# Altium PCB CL-HC-V2.1 sub.PcbDoc (part 1 of 2)
Units mil, origin at the board's own origin, x right, y up, seen from the top; angles counter-clockwise.
Board outline 12846.15 x 9153.85 mil, 2 copper layers (TopLayer, BottomLayer); 137 components, 528 nets, 526 pads, 1 vias.
Unrouted connection lines stored in the file: 32.
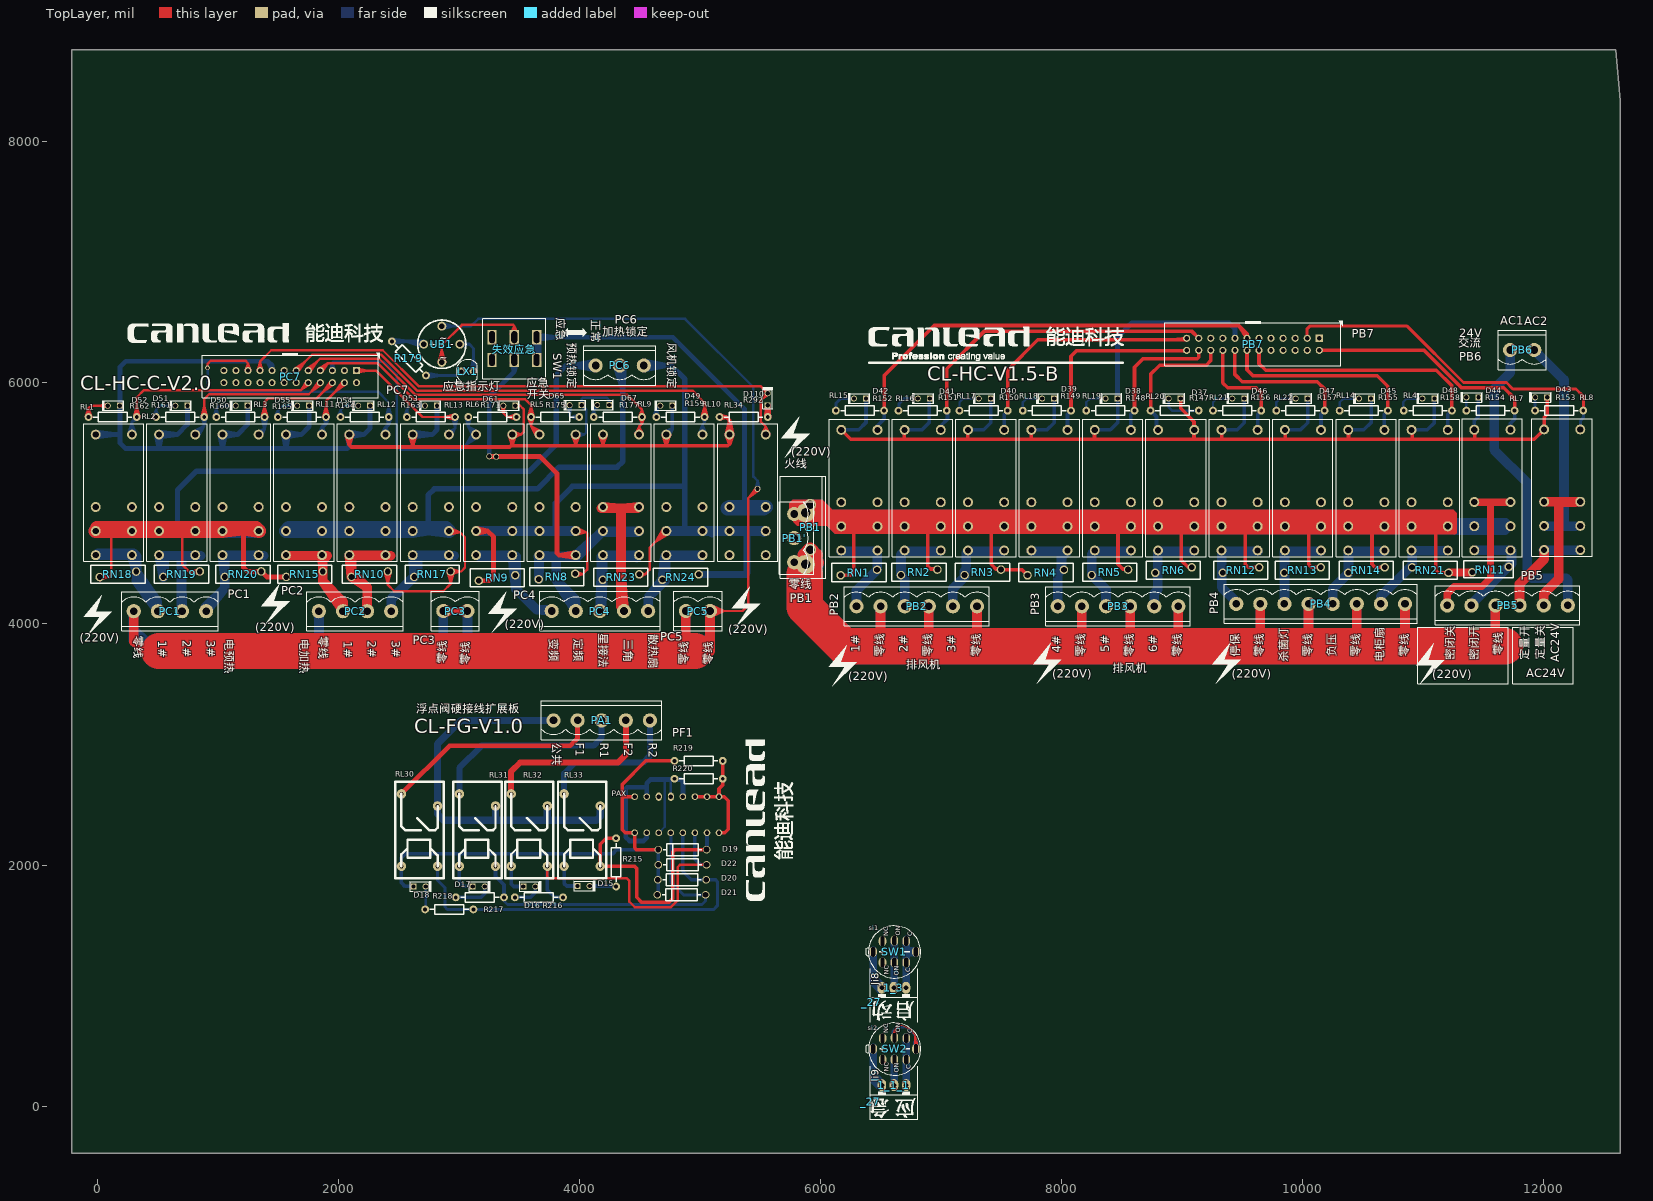
[diagram p0: TopLayer view]
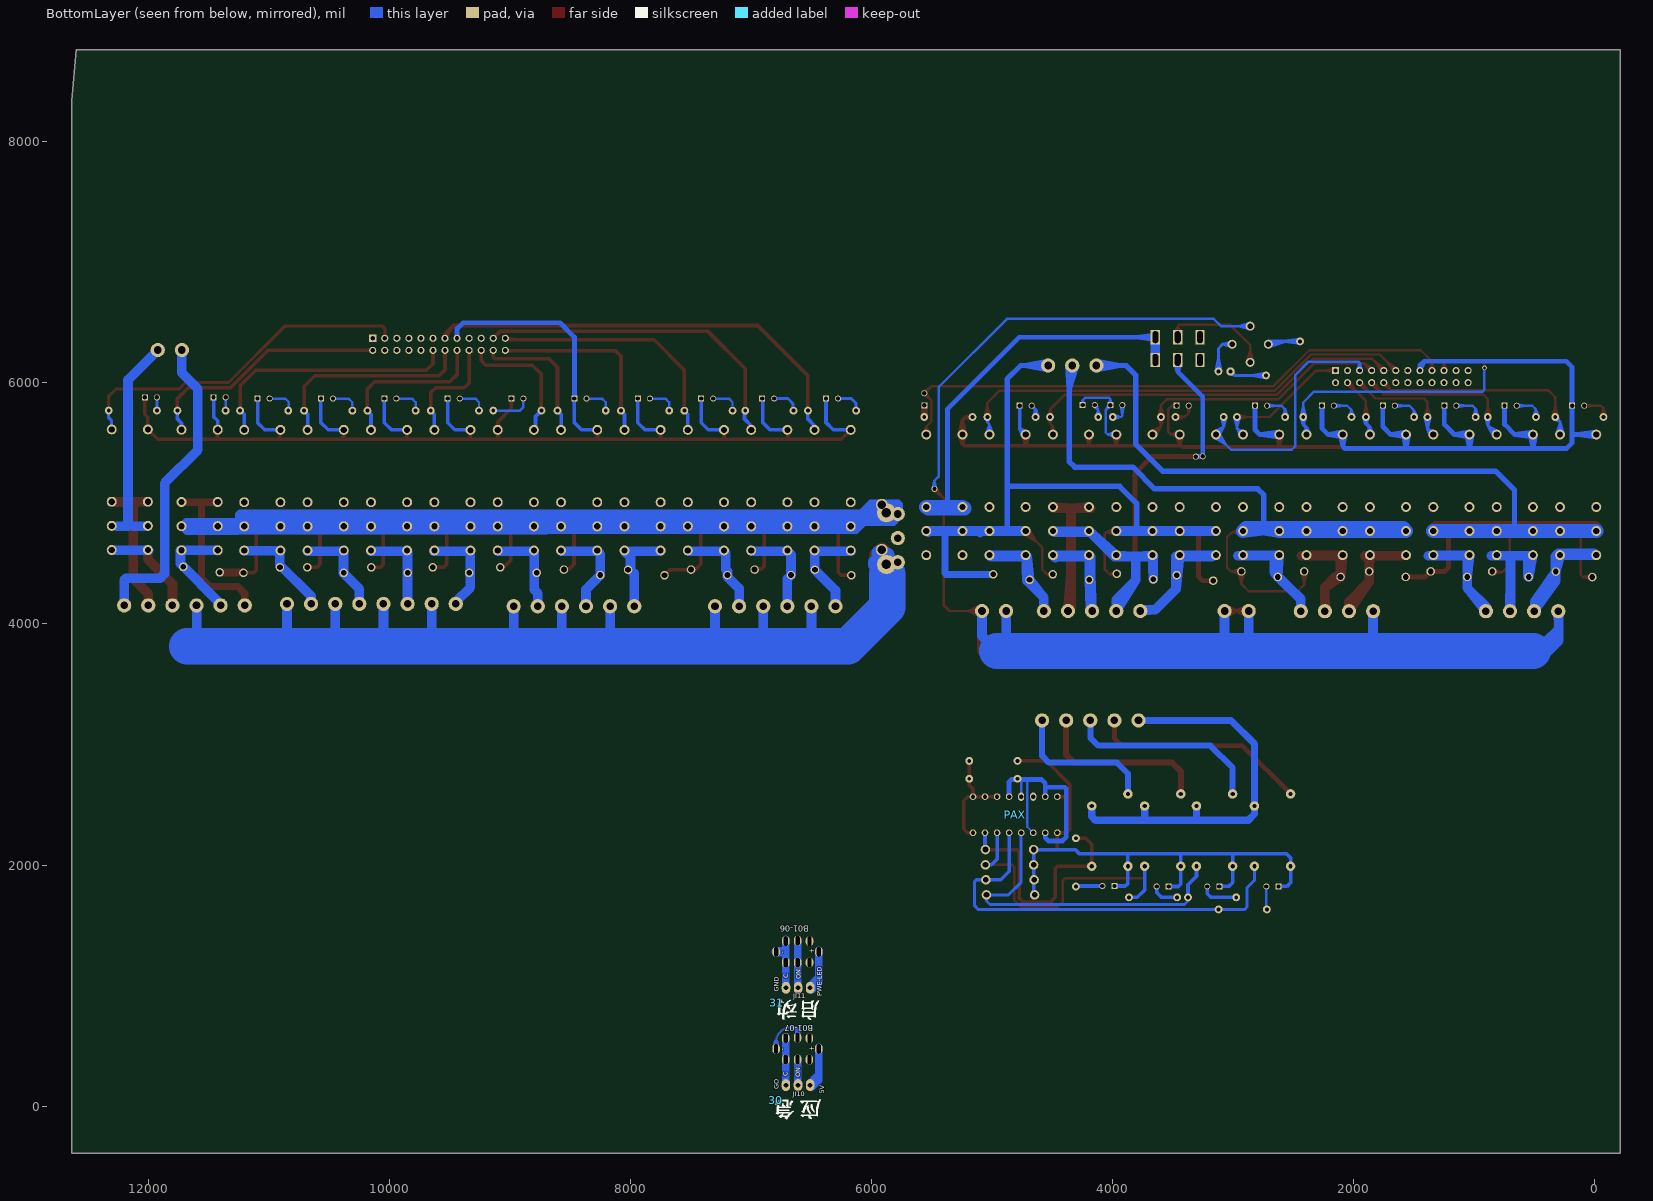
[diagram p1: BottomLayer view, seen from below]

## Layer stack, top to bottom
TopSolder: solder mask 0.4, Solder Resist, Dk 3.5
TopLayer: signal copper 1.4
Dielectric1: dielectric 12.6, FR-4, Dk 4.8
BottomLayer: signal copper 1.4
BottomSolder: solder mask 0.4, Solder Resist, Dk 3.5

## Board outline
12597.31,8763.6 -210.38,8763.6 -210.38,-390.24 12635.77,-390.24 12635.77,8340.52

## Design rules (kind name [scope] priority, off if disabled: settings)
Clearance Clearance_1 [All] p1 off: gap=30
Clearance [All] p2: gap=15
ComponentClearance [All] p1 off: gap=10 collisioncheckmode=3 verticalgap=10 showdistances=FALSE
FabricationTestPointUsage TestPointUsage [All] p1: valid=0 allowmultiple=FALSE
FabricationTestpoint Testpoint [All] p1: side=3 testpointundercomponent=TRUE minsize=40 maxsize=100 preferedsize=60 minholesize=20 maxholesize=40 preferedholesize=32 testpointgrid=1 allowsidetop=TRUE allowsidebottom=TRUE usegrid=TRUE gridtolerance=0.01
PolygonConnect PolygonConnect_1 [All vs (InPadClass('All Pads'))] p1: connectstyle=NoConnect reliefconductorwidth=10 reliefentries=4 polygonreliefangle="90 Angle" airgapwidth=10
PolygonConnect [All] p2: connectstyle=Direct reliefconductorwidth=10 reliefentries=4 polygonreliefangle="90 Angle" airgapwidth=10
RoomDefinition patch [InComponentClass('patch')] p1: confinementstyle=ConfineIn formatcopy=TRUE lockcomponents=FALSE outline -2150,7720.31 -950,7720.31 -950,4279.31 -2150,4279.31
RoomDefinition Lights [InComponentClass('Lights')] p2: confinementstyle=ConfineIn formatcopy=TRUE lockcomponents=FALSE outline 14197.83,3159.45 15242.13,3159.45 15242.13,3920.28 14197.83,3920.28
RoomDefinition MCU单片机 [InComponentClass('MCU单片机')] p3: confinementstyle=ConfineIn formatcopy=TRUE lockcomponents=FALSE outline 15430.12,9928.15 13948.82,9928.15 13948.82,10710.63 15430.12,10710.63
RoutingVias [All] p1: holewidth=24 width=40 viastyle="Through Hole" minholewidth=24 minwidth=40 maxholewidth=24 maxwidth=40
SilkToSolderMaskClearance SilkscreenOverComponentPads [IsPad] p1: minsilkscreentomaskgap=10 clearancetoexposedcopper=TRUE
SolderMaskExpansion [All] p1: expansion=4
Width [All] p1: maxlimit=300 minlimit=10 preferedwidth=30
25 further rules are at their usual default settings.

## Classes and differential pairs
component class Lights: D74 Q11 R118 R194 RN22 Y1 Y2
component class MCU单片机: 1 24V C1 C2 C3 C4 C5 C6 C7 C8 C19 C20 C29 C30 C31 C32 C34 C35 CU1 D1 D2 D3 F F2 P P1 R1 R2 R3 R4 R5 R6 R7 R8 R9 R11 R12 R13 R35 R79 U1 VR1 ѹ? 冷/自/热 定频/变频 客户接线自动门1 情报面 星/三角 电柜内部1 电柜内部2 电柜风扇

## Components (designator, comment, footprint, x,y, rotation, side; value= is the part's Value field where it differs from the comment)
1_1_1 "J15" 3p 6610.71,213.91 r180 top
1_3 "J15" 3p 6610.32,1021 r180 top
30 "" place-han_zi_z 6793.7,49.11 r180 bottom
31 "" place-han_zi_z 6785.83,856.2 r180 bottom
_27 "" place-han_zi_z 6419.68,37.3 r0 top
_27 "" place-han_zi_z 6427.56,860.13 r0 top
D15 "" RT_LED1 4035.83,1826.11 r180 top (schematic designator D64)
D16 "" RT_LED1 3585.83,1822.22 r180 top (schematic designator D63)
D17 "" RT_LED1 3165.83,1822.74 r180 top (schematic designator D62)
D18 "" RT_LED1 2675.83,1822.74 r180 top (schematic designator D59)
D19 "1n4007" DIODEAK 4856.28,2128.21 r180 top (schematic designator D70)
D20 "1n4007" DIODEAK 4852.32,1877.75 r180 top (schematic designator D69)
D21 "1n4007" DIODEAK 4848.08,1752.53 r180 top (schematic designator D4)
D22 "1n4007" DIODEAK 4856.28,2001.4 r180 top (schematic designator D68)
D37 "GREEN" RT_LED1 8938.5,5869.33 r0 top
D38 "GREEN" RT_LED1 8415.4,5869.33 r0 top
D39 "GREEN" RT_LED1 7889.77,5869.33 r0 top
D40 "GREEN" RT_LED1 7364.14,5869.33 r0 top
D41 "GREEN" RT_LED1 6858.5,5869.33 r0 top
D42 "RED" RT_LED1 6328.5,5869.33 r0 top
D43 "GREEN" RT_LED1 11978.5,5879.33 r0 top
D44 "GREEN" RT_LED1 11408.5,5879.33 r0 top
D45 "GREEN" RT_LED1 10517.93,5869.33 r0 top
D46 "" RT_LED1 9466.67,5869.33 r0 top
D47 "GREEN" RT_LED1 9992.3,5869.33 r0 top
D48 "GREEN" RT_LED1 11043.56,5869.33 r0 top
D49 "GREEN" RT_LED1 4722.2,5810 r0 top locked
D50 "GREEN" RT_LED1 1200,5810 r0 top locked
D51 "" RT_LED1 700,5810 r0 top locked
D52 "GREEN" RT_LED1 140,5810 r0 top locked
D53 "GREEN" RT_LED1 2770,5810 r0 top locked
D54 "GREEN" RT_LED1 2215.64,5810 r0 top locked
D55 "GREEN" RT_LED1 1710,5810 r0 top locked
D61 "GREEN" RT_LED1 3420,5810 r0 top locked
D65 "GREEN" RT_LED1 3970,5815 r0 top locked
D67 "GREEN" RT_LED1 4199.27,5815.92 r0 top locked
D110 "GREEN" RT_LED1 5563.38,5863.45 r270 top
LX1 "" LEDA 3023.66,6094.87 r180 top locked (schematic designator 红?)
PA1 "情报面板与电柜输入" pl5x 4186.38,3200 r0 top (schematic designator 外?)
PAX "Header 8X2" centipede-16 4809.58,2417.3 r90 bottom (schematic designator P19)
PB1 "硬接线" 95-2P 5915.74,4614.99 r90 top (schematic designator AC24Vin2)
PB1' "硬接线" PL3X 5782.6,4512.08 r90 top (schematic designator 客户接线1)
PB2 "Header 6" PL6X 6799.43,4146.34 r0 top (schematic designator 客户接线2)
PB3 "Header 6" PL6X 8469.43,4146.34 r0 top (schematic designator 客户接线3)
PB4 "Header 8" PL8X 10149.43,4166.34 r0 top (schematic designator 杀菌/停保)
PB5 "硬接线" PL6X 11700.08,4153.96 r0 top (schematic designator 客接新?)
PB6 "硬接线" PL2X 11821.07,6272.28 r180 top (schematic designator AC24Vin2)
PB7 "Con2*12-1mm" FC24LX 9588.5,6319.33 r180 top (schematic designator P21)
PC1 "Header 4" PL4X 605.12,4105.93 r0 top locked (schematic designator 再热)
PC2 "Header 4" PL4X 2140.12,4105.93 r0 top locked (schematic designator 预热)
PC3 "硬接线" PL2X 2972.64,4106.99 r180 top locked (schematic designator P24)
PC4 "硬接线" PL5X 4171.46,4106.99 r180 top locked (schematic designator 送风机)
PC5 "硬接线" PL2X 4984.85,4106.99 r180 top locked (schematic designator P24)
PC6 "Header 3" PL3X 4135.83,6143.7 r0 top locked (schematic designator 火线)
PC7 "Con2*12-1mm" FC24LX 1602.35,6051.59 r180 top (schematic designator P21)
R147 "15K" AXIAL0.4 9138.5,5769.33 r180 top
R148 "15K" AXIAL0.4 8205.93,5769.7 r0 top
R149 "15K" AXIAL0.4 7679.77,5769.33 r0 top
R150 "15K" AXIAL0.4 7154.14,5769.33 r0 top
R151 "15K" AXIAL0.4 6649.03,5769.33 r0 top
R152 "15K" AXIAL0.4 6129.03,5769.7 r0 top
R153 "15K" AXIAL0.4 11929.03,5770.06 r0 top
R154 "15K" AXIAL0.4 11359.03,5769.7 r0 top
R155 "15K" AXIAL0.4 10307.93,5769.33 r0 top
R156 "15K" AXIAL0.4 9257.19,5769.7 r0 top
R157 "15K" AXIAL0.4 9782.82,5769.7 r0 top
R158 "15K" AXIAL0.4 10839.03,5769.7 r0 top
R159 "15K" AXIAL0.4 4640.38,5716.68 r0 top locked
R160 "15K" AXIAL0.4 990.38,5716.68 r0 top locked
R161 "15K" AXIAL0.4 490.38,5716.68 r0 top locked
R162 "15K" AXIAL0.4 -69.62,5716.68 r0 top locked
R163 "15K" AXIAL0.4 2570.38,5716.68 r0 top locked
R164 "15K" AXIAL0.4 2020.38,5716.68 r0 top locked
R165 "15K" AXIAL0.4 1500.38,5716.68 r0 top locked
R171 "15K" AXIAL0.4 3479.48,5715.94 r180 top locked
R175 "15K" AXIAL0.4 3999.83,5715.94 r180 top locked
R177 "15K" AXIAL0.4 4120.52,5716.68 r0 top locked
R179 "51K 2512 1W" AXIAL0.4 2728.33,6061.31 r135 top locked
R215 "15K" AXIAL0.4 4305.47,1822.75 r90 top (schematic designator R174)
R216 "15K" AXIAL0.4 3466.36,1732.59 r0 top (schematic designator R173)
R217 "15K" AXIAL0.4 2976.36,1732.59 r0 top (schematic designator R172)
R218 "15K" AXIAL0.4 2722.34,1632.59 r0 top (schematic designator R169)
R219 "100K" AXIAL0.4 5189.47,2863.77 r180 top (schematic designator R173)
R220 "20K" AXIAL0.4 5189.47,2715.11 r180 top (schematic designator R173)
R292 "15K" AXIAL0.4 5163.91,5716.68 r0 top locked
RL1 "三级预热" HF115-5#1 139.33,5070.44 r0 top locked
RL2 "二级预热" HF115-5#1 665.21,5070.44 r0 top locked
RL3 "一级预热" HF115-5#1 1191.08,5070.44 r0 top locked
RL4 "送风机散热风扇" HF115-5#1 11054.09,5109.8 r0 top
RL5 "送风机定频起停" HF115-5#1 3820.45,5070.44 r0 top locked
RL6 "送风机变频起停" HF115-5#1 3294.58,5070.44 r0 top locked
RL7 "新风密闭执行" HF115-5#1 11574.12,5110.92 r0 top
RL8 "新风定量执行" HF115-5#1 12153.49,5113.54 r0 top
RL9 "星三角切换" HF115-5#1 4346.32,5070.44 r0 top locked
RL10 "电柜散热风扇" HF115-5#1 4872.2,5070.44 r0 top locked
RL11 "三级再热" HF115-5#1 1716.95,5070.44 r0 top locked
RL12 "二级再热" HF115-5#1 2242.83,5070.44 r0 top locked
RL13 "一级再热" HF115-5#1 2768.7,5070.44 r0 top locked
RL14 "负压排风" HF115-5#1 10528.46,5109.8 r0 top
RL15 "6#排风机" HF115-5#1 6323.4,5109.8 r0 top
RL16 "5#排风机" HF115-5#1 6849.03,5109.8 r0 top
RL17 "4#排风机" HF115-5#1 7374.67,5109.8 r0 top
RL18 "3#排风机" HF115-5#1 7900.3,5109.8 r0 top
RL19 "2#排风机" HF115-5#1 8425.93,5109.8 r0 top
RL20 "1#排风机" HF115-5#1 8951.56,5109.8 r0 top
RL21 "停机保护" HF115-5#1 9477.2,5109.8 r0 top
RL22 "杀菌灯" HF115-5#1 10002.83,5109.8 r0 top
RL30 "POL->运行监控" RELAY12V 2425.1,2590.09 r270 top (schematic designator RL33)
RL31 "POL->值机监控" RELAY12V 2905.83,2590.09 r270 top (schematic designator RL32)
RL32 "POL->加湿电磁阀" RELAY12V 3335.5,2590.09 r270 top (schematic designator RL31)
RL33 "POL->加湿电磁阀" RELAY12V 3774.22,2590.09 r270 top (schematic designator RL30)
RL34 "星三角切换" HF115-5#2 5396.7,5070.44 r180 top locked
RN1 "1D471" RAD0.3#1 6319.43,4426.34 r180 top
RN2 "1D471" RAD0.3#1 6819.93,4428.06 r0 top
RN3 "1D471" RAD0.3#1 7347.05,4428.06 r0 top
RN4 "1D471" RAD0.3#1 7869.43,4426.34 r180 top
RN5 "1D471" RAD0.3#1 8401.28,4428.06 r0 top
RN6 "1D471" RAD0.3#1 8929.43,4446.34 r0 top
RN8 "1D471" RAD0.3#1 3814.63,4393.07 r0 top locked
RN9 "1D471" RAD0.3#1 3318.25,4381.59 r180 top locked
RN10 "1D471" RAD0.3#1 2261.7,4412.39 r0 top locked
RN11 "1D471" RAD0.3#1 11558.45,4450.9 r180 top
RN12 "1D471" RAD0.3#1 9489.43,4446.34 r0 top
RN13 "1D471" RAD0.3#1 9999.43,4446.34 r0 top
RN14 "1D471" RAD0.3#1 10529.43,4446.34 r0 top
RN15 "1D471" RAD0.3#1 1721.7,4412.39 r180 top locked
RN17 "1D471" RAD0.3#1 2781.7,4412.39 r0 top locked
RN18 "1D471" RAD0.3#1 173.13,4411.74 r180 top locked
RN19 "1D471" RAD0.3#1 701.7,4412.39 r0 top locked
RN20 "1D471" RAD0.3#1 1211.7,4412.39 r0 top locked
RN21 "1D471" RAD0.3#2 11059.43,4446.34 r0 top
RN23 "1D471" RAD0.3#1 4346.39,4388.31 r0 top locked
RN24 "1D471" RAD0.3#1 4841.02,4388.31 r0 top locked
SW1 "Comment" SW-LARGE 6614.96,1281.98 r0 top
SW2 "Comment" SW-LARGE 6615.75,476.47 r0 top
UB1 "DB107S" BRI-W04 2860,6320 r0 top locked (schematic designator U1X)
失效应急 "Header 6" SEL220V 3461.43,6284.2 r0 top locked

## Footprints (in the part's own frame and the unit in brackets; to place one, negate y for a bottom-side part, rotate by r counter-clockwise, add the part's x,y. Pads: shape width x height; smd on the part's side, far side on the other; paste and mask are expansions set on the pad)
3p [mm]
  oval 1.8x2.5 hole 1: +(2.54,1) -(-2.54,1) ON(0,1)
  silkscreen extent -5,-3 5,3
95-2P [mm]
  round 2.5 hole 1.8: 1(0,0) 2(9.5,0)
  silkscreen extent -6,-3.3 15.5,6.28
AXIAL0.4 [mil]
  round 65 hole 32: 1(-0.52,-0.37) 2(399.48,-0.37)
  silkscreen extent 39,-40 359,40, body extent -12,-45 412,46, height 116
BRI-W04 [mil]
  round 75 hole 45: 1(0,150) 2(0,-150) 3(-150,0) 4(150,0)
  silkscreen extent -200,-200 200,200
centipede-16 [mil]
  round 55 hole 36: 1(150,-350) 2(-150,-350) 3(150,-250) 4(-150,-250) 6(-150,-150) 8(-150,-50) 9(150,50) 10(-150,50) 11(150,150) 12(-150,150) 13(150,250) 14(-150,250) 15(150,350) 16(-150,350)
  oval 70x50 hole 36: 5(150,-150) 7(150,-50)
DIODEAK [mm]
  round 1.6 / inner round 1.6 / far side round 2 hole 1.2: A(-5.08,0) K(5.08,0)
  silkscreen extent -4.06,-1.27 4.06,1.27, body extent -5.53,-1.3 5.53,1.3, height 3.3
FC24LX [mm]
  rect 1.5x1.5 hole 0.9: 1(-13.97,-1.27)
  round 1.5 hole 0.9: 2(-13.97,1.27) 3(-11.43,-1.27) 4(-11.43,1.27) 5(-8.89,-1.27) 6(-8.89,1.27) 7(-6.35,-1.27) 8(-6.35,1.27) 9(-3.81,-1.27) 10(-3.81,1.27) 11(-1.27,-1.27) 12(-1.27,1.27) 13(1.27,-1.27) 14(1.27,1.27) 15(3.81,-1.27) 16(3.81,1.27) 17(6.35,-1.27) 18(6.35,1.27) 19(8.89,-1.27) 20(8.89,1.27) 21(11.43,-1.27) 22(11.43,1.27) 23(13.97,-1.27) 24(13.97,1.27)
  silkscreen extent -18.9,-5.01 18.54,4.5
HF115-5#1 [mm]
  round 2.1 hole 1.3: 1(-3.81,12.7) 2(3.81,12.7) 3(-3.81,-12.7) 3(3.81,-12.7) 4(-3.81,-7.62) 4(3.81,-7.62) 5(-3.81,-2.54) 5(3.81,-2.54)
  silkscreen extent -6.37,-14.01 6.33,14.99
HF115-5#2 [mm]
  round 2.1 hole 1.3: 1(-3.81,-12.7) 2(3.81,-12.7) 3(-3.81,12.7) 3(3.81,12.7) 4(-3.81,7.62) 4(3.81,7.62) 5(-3.81,2.54) 5(3.81,2.54)
  silkscreen extent -6.37,-14.99 6.33,14.01
LEDA [mil]
  oct 65x65 hole 32: A(0,0)
  round 65 hole 32: K(-100,0)
  silkscreen extent -131,-98 46,99
PL2X [mm]
  round 3 hole 1.6: 1(-2.54,0) 2(2.54,0)
  silkscreen extent -5.08,-4.13 5.08,4.13
PL3X [mm]
  round 3 hole 1.6: 1(0,0) 2(5.08,0) 3(10.16,0)
  silkscreen extent -2.54,-4.13 12.7,3.18
PL4X [mm]
  round 3 hole 1.6: 1(-7.62,0) 2(-2.54,0) 3(2.54,0) 4(7.62,0)
  silkscreen extent -10.16,-4.13 10.16,4.13
pl5x [mm]
  round 3 hole 1.6: 1(-10.16,0) 2(-5.08,0) 3(0,0) 4(5.08,0) 5(10.16,0)
  silkscreen extent -12.7,-4.13 12.7,4.13
PL5X [mm]
  round 3 hole 1.6: 1(-10.16,0) 2(-5.08,0) 3(0,0) 4(5.08,0) 5(10.16,0)
  silkscreen extent -12.7,-4.13 12.7,4.13
PL6X [mm]
  round 3 hole 1.6: 1(-12.7,0) 2(-7.62,0) 3(-2.54,0) 4(2.54,0) 5(7.62,0) 6(12.7,0)
  silkscreen extent -15.24,-4.13 15.24,4.13
PL8X [mm]
  round 3 hole 1.6: 1(-17.78,0) 2(-12.7,0) 3(-7.62,0) 4(-2.54,0) 5(2.54,0) 6(7.62,0) 7(12.7,0) 8(17.78,0)
  silkscreen extent -20.32,-4.13 20.32,4.13
place-han_zi_z [mil]
RAD0.3#1 [mm]
  round 1.8 hole 1.2: 1(3.84,0.58) 2(-3.84,-0.58)
  silkscreen extent -5.76,-1.91 5.67,1.91
RAD0.3#2 [mm]
  round 1.8 hole 1.2: 1(3.84,-0.58) 2(-3.84,0.58)
  silkscreen extent -5.76,-1.91 5.67,1.91
RELAY12V [mm]
  round 2 hole 0.9: 1(15.24,2.54) 2(15.24,10.16) 3(0,2.54) 4(2.54,10.16)
  silkscreen extent -2.54,1.27 17.78,11.43
RT_LED1 [mil]
  rect 50x50 hole 36: A(50,0)
  round 50 hole 36: K(-50,0)
  silkscreen extent -100,-44 84,44, body extent -84,-44 84,44, height 236
SEL220V [mm]
  rect 2x3 hole 1.2 slot 2.5 at 90 deg: 1(-4.7,-2.4) 2(0,-2.4) 3(4.7,-2.4) 4(-4.7,2.4) 5(0,2.4) 6(4.7,2.4)
  silkscreen extent -6.6,-6.4 6.6,6.4
SW-LARGE [mm]
  oval 1.6x2.1 hole 0.8 slot 2 at 90 deg: 0(-2.53,2.205) 1(-0.03,2.305) 2(2.47,2.205) 3(-2.53,-2.295) 4(-0.03,-2.295) 5(2.47,-2.295) 6(-4.5,-0.045) 7(4.5,-0.035)
  silkscreen extent -5.93,-5.56 5.51,5.44

## Part data
D15 D16 D17 D18 D37 D38 D39 D40 D41 D42 D43 D44 D45 D46 D47 D48 D49 D50 D51 D52 D53 D54 D55 D61 D65 D67 D110: library part LED, "Zener Diode"
D19 D20 D21 D22: library part DIODE, "Diode"
PA1: library part "Header 5", "Header, 5-Pin"
PAX: "Header, 8-Pin, Dual"
PC3 PC5: library part "Header 2", "Header, 2-Pin"
R147 R148 R149 R150 R151 R152 R153 R154 R155 R156 R157 R158 R159 R160 R161 R162 R163 R164 R165 R171 R175 R177 R179 R215 R216 R217 R218 R219 R220 R292: library part RES2
RL1 RL2 RL3 RL4 RL5 RL6 RL10 RL11 RL12 RL13 RL14 RL15 RL16 RL17 RL18 RL19 RL20 RL21 RL22 RL30 RL31 RL32 RL33: library part RELAY
RL34: library part HF3FF
RN1 RN2 RN3 RN4 RN5 RN6 RN8 RN9 RN10 RN11 RN12 RN13 RN14 RN15 RN17 RN18 RN19 RN20 RN21 RN23 RN24: library part RN
UB1: library part Bridge
失效应急: "Header, 6-Pin"

## Free pads (board coordinates)
  round 50 hole 36: 0(3253.63,5389.81) 1(3310.78,5387.45) 2(5479.2,5120.42)
  round 157.48 hole 78.74: 0(5876.88,4493.05) 0(5876.88,4922.18)
  round 65 hole 36: 0(11427.56,5602.53)

## Via types
v1: diameter 40, hole 24, TopLayer to BottomLayer, tented both sides, 1 vias

## Nets (pads, with @x,y where several pads share a name; then routed paths per layer and width w, separated by ;. In a path a pad name is that pad's centre, name@x,y a point inside that pad or via, vN(x,y) a via of type N, cw(c..) or ccw(c..) an arc to the next point about the centre after c; other vN are vias at no path point)
1C2: PC4.5 RL6.3 RN9.2 | length 2620.2
  BottomLayer w80: RL6.3@3144.58,4570.44 RL6.3@3429.84,4559.16 ; RL6.3@3161.15,4569.79 RL6.3@3444.58,4570.44 ; PC4.5@3771.02,4118.31 3646.66,4118.31 ; PC4.5@3771.46,4106.99 3646.66,4118.31 ; RL6.3@3444.58,4570.44 3175.47,4559.16 RL6.3@3475.47,4559.16 ; RL6.3@3444.58,4570.44 3475.47,4289.49 ; RL6.3@3444.58,4570.44 RN9.2@3469.44,4404.42 ; RN9.2@3469.44,4404.42 3475.47,4289.49 ; RN9.2@3469.44,4404.42 RL6.3@3475.47,4559.16 ; 3475.47,4289.49 3646.66,4118.31 ; 3475.47,4289.49 RL6.3@3475.47,4559.16
1C3: pad.0@3253.63,5389.81 pad.1 PC4.4 RL5.3 RL9.4 RN8.2 失效应急.2 | length 8237.8
  TopLayer w40: 3398.63,5389.8 pad.0@3253.63,5389.81 pad.1@3310.78,5387.45 ; 3455.88,5389.8 pad.1@3310.78,5387.45 ; RL5.3@3968.79,4549.17 3833.34,4570.44 ; RL5.3@3968.79,4591.72 3833.34,4570.44 ; RL5.3@3970.45,4570.44 3833.34,4570.44 ; pad.1@3310.78,5387.45 pad.0@3253.63,5389.81 3673.36,5389.8 3814.32,5248.84 3814.32,4589.47 3833.34,4570.44
  BottomLayer w39.37: 3253.62,5532.92 pad.0@3253.63,5389.81 ; 失效应急.2@3441.9,6167.58 3461.43,6090.96 ; 失效应急.2@3461.43,6170.03 3461.43,6090.96 ; 失效应急.2@3461.43,6189.71 3461.43,6090.96 ; 失效应急.2@3480.96,6167.58 3461.43,6090.96 ; pad.0@3253.63,5389.81 pad.1@3310.78,5387.45 3308.42,5389.81 pad.0@3253.63,5389.81 ; pad.0@3253.63,5389.81 3253.62,5883.15 3461.43,6090.96
  BottomLayer w80: RL5.3@3659.16,4559.26 RL5.3@3661.02,4557.4 ; PC4.4@3971.02,4118.31 3971.02,4201.54 ; RL5.3@3975.31,4574.72 RL9.4@4196.32,4770.44 ; RL5.3@3985.17,4559.56 RL9.4@4196.32,4770.44 ; RL9.4@4195.63,4770.01 RL9.4@4184.87,4759.26 ; RL9.4@4213.45,4759.26 RL9.4@4496.32,4770.44 ; RL9.4@4478.52,4759.26 RL9.4@4196.32,4770.44 ; RL9.4@4479.91,4769.79 RL9.4@4196.32,4770.44 ; RL9.4@4484.87,4759.26 RL9.4@4184.87,4759.26 ; RL5.3@3661.02,4557.4 RL5.3@3663.45,4554.97 ; RL5.3@3661.02,4557.4 3662.88,4559.26 3817.54,4559.26 ; RN8.2@3663.45,4370.23 RL5.3@3670.45,4570.44 ; RN8.2@3663.45,4370.23 RL5.3@3663.45,4554.97 ; RN8.2@3663.45,4370.23 RL5.3@3670.45,4570.44 ; RN8.2@3663.45,4370.23 RL5.3@3663.45,4554.97 ; RL5.3@3670.45,4570.44 3817.54,4559.26 ; 3807.92,4364.63 PC4.4@3971.46,4106.99 ; 3807.92,4364.63 3971.02,4201.54 ; 3807.92,4364.63 3807.92,4549.64 3817.54,4559.26 ; 3817.54,4559.26 RL5.3@3970.45,4570.44 RL9.4@4184.87,4759.26 ; 3817.54,4559.26 3984.87,4559.26 RL9.4@4184.87,4759.26 ; 3971.02,4201.54 PC4.4@3971.46,4106.99 ; 3971.02,4201.54 PC4.4@3971.46,4106.99
1C6: PB4.7 RL4.3 RN21.2 | length 848.7
  BottomLayer w80: PB4.7@10649.43,4166.34 10649.43,4230.28 10909.59,4490.44 10909.59,4607.29 RL4.3@11209.59,4607.29
1C7: PC1.4 RL3.3 RN20.2 | length 2184.2
  BottomLayer w80: PC1.4@900.51,4139.25 1060.52,4299.26 ; PC1.4@905.12,4105.93 1060.52,4299.26 ; RL3.3@1059.5,4570.22 RL3.3@1341.08,4570.44 ; RL3.3@1322.53,4566.99 RL3.3@1041.08,4570.44 ; RL3.3@1041.08,4570.44 1084.49,4566.99 ; RL3.3@1041.08,4570.44 RN20.2@1060.52,4389.56 ; RL3.3@1041.08,4570.44 1084.49,4566.99 ; 1060.52,4299.26 RN20.2@1060.52,4389.56 ; RN20.2@1060.52,4389.56 1060.52,4543.02 1084.49,4566.99 ; 1084.49,4566.99 RL3.3@1341.08,4570.44 ; 1084.49,4566.99 1384.49,4566.99 RL3.3@1341.08,4570.44
1C8: PC1.3 RL2.3 RN19.2 | length 2167.6
  BottomLayer w80: PC1.3@700.51,4139.25 700.51,4566.99 ; 700.51,4405.3 PC1.3@705.12,4105.93 ; RL2.3@515.21,4570.44 RN19.2@550.52,4389.56 558.85,4566.99 ; RL2.3@515.21,4570.44 558.85,4397.9 558.85,4566.99 ; RL2.3@515.21,4570.44 558.85,4566.99 ; RL2.3@515.21,4570.44 558.85,4566.99 ; RL2.3@515.21,4570.44 700.51,4566.99 ; 558.85,4566.99 700.51,4566.99 ; 700.51,4566.99 RL2.3@815.21,4570.44 858.85,4566.99 700.51,4566.99
1C9: PC1.2 RL1.3 RN18.2 | length 3415.8
  BottomLayer w80: RL1.3@-10.67,4570.44 RL1.3@273.28,4583.78 ; RL1.3@4.99,4571.18 RL1.3@289.33,4570.44 ; RL1.3@6.2,4583.78 306.2,4583.78 RL1.3@328.25,4561.73 ; RL1.3@6.89,4583.78 RL1.3@289.33,4570.44 ; 356.43,4388.95 PC1.2@505.12,4105.93 ; PC1.2@500.51,4139.25 500.51,4184.25 ; RL1.3@289.33,4570.44 RN18.2@324.31,4434.58 ; RL1.3@289.33,4570.44 RN18.2@328.25,4429.38 ; 324.31,4360.45 PC1.2@505.12,4105.93 ; 324.31,4360.45 RN18.2@324.31,4434.58 ; 324.31,4360.45 500.51,4184.25 ; 324.31,4360.45 324.31,4397.18 ; 324.31,4397.18 RN18.2@324.31,4434.58 ; 324.31,4397.18 328.25,4401.11 RN18.2@328.25,4429.38 ; 324.31,4397.18 RN18.2@324.31,4434.58 ; RN18.2@324.31,4434.58 500.51,4184.25 ; RN18.2@324.31,4434.58 RL1.3@328.25,4561.73 ; RN18.2@328.25,4429.38 RL1.3@328.25,4561.73 ; 500.51,4184.25 PC1.2@505.12,4105.93 ; 500.51,4184.25 PC1.2@505.12,4105.93 ; 500.51,4184.25 PC1.2@505.12,4105.93
1C10: PC2.4 RL13.3 RN17.2 | length 2878.6
  BottomLayer w80: PC2.4@2440.12,4105.93 2441.7,4208.79 ; PC2.4@2441.7,4112.39 2441.7,4208.79 ; RL13.3@2900.15,4566.99 RL13.3@2618.7,4570.44 ; 2441.7,4208.79 RN17.2@2630.52,4389.56 ; 2441.7,4208.79 2661.38,4428.48 ; RL13.3@2618.7,4570.44 RN17.2@2630.52,4389.56 ; RL13.3@2618.7,4570.44 2661.38,4566.99 ; RL13.3@2618.7,4570.44 RL13.3@2918.7,4570.44 ; RL13.3@2618.7,4570.44 2661.38,4566.99 ; RL13.3@2618.7,4570.44 2661.38,4428.48 ; RL13.3@2618.7,4570.44 2661.38,4566.99 ; RN17.2@2630.52,4389.56 2661.38,4428.48 ; RN17.2@2630.52,4389.56 2661.38,4428.48 ; RN17.2@2630.52,4389.56 2661.38,4428.48 ; RN17.2@2630.52,4389.56 2661.38,4566.99 ; 2661.38,4428.48 2661.38,4566.99 ; 2661.38,4566.99 RL13.3@2918.7,4570.44 ; 2661.38,4566.99 2961.38,4566.99 RL13.3@2918.7,4570.44
1C11: PC2.3 RL12.3 RN10.2 | length 2624.8
  TopLayer w80: PC2.3@2240.12,4105.93 2241.7,4303.67 ; PC2.3@2241.7,4107.69 2241.7,4303.67 ; RL12.3@2374.28,4566.99 RL12.3@2092.83,4570.44 ; RL12.3@2092.83,4570.44 RN10.2@2110.52,4389.56 ; RL12.3@2092.83,4570.44 2135.75,4566.99 ; RL12.3@2092.83,4570.44 RL12.3@2392.83,4570.44 ; RL12.3@2092.83,4570.44 RN10.2@2110.52,4389.56 ; RL12.3@2092.83,4570.44 2135.75,4566.99 ; RL12.3@2092.83,4570.44 2135.75,4566.99 ; RN10.2@2110.52,4389.56 2155.81,4389.56 ; RN10.2@2110.52,4389.56 2241.7,4303.67 ; RN10.2@2110.52,4389.56 2110.52,4541.75 2135.75,4566.99 ; RN10.2@2110.52,4389.56 2155.81,4389.56 ; 2135.75,4566.99 RL12.3@2392.83,4570.44 ; 2135.75,4566.99 2435.75,4566.99 RL12.3@2392.83,4570.44 ; 2155.81,4389.56 2241.7,4303.67
1C12: PC2.2 RL11.3 RN15.2 | length 1861.7
  TopLayer w80: PC2.2@2041.7,4107.69 2041.7,4183.06 ; 1769.05,4566.99 RL11.3@1566.95,4570.44 1610.12,4566.99 1769.05,4566.99 ; 1769.05,4566.99 RL11.3@1866.95,4570.44 ; 1769.05,4566.99 1910.12,4566.99 ; RL11.3@1866.95,4570.44 1910.12,4566.99 ; RL11.3@1866.95,4570.44 1910.12,4566.99 ; RL11.3@1866.95,4570.44 RN15.2@1872.88,4435.23 ; 1872.88,4351.88 PC2.2@2040.12,4105.93 ; 1872.88,4351.88 2041.7,4183.06 ; 1872.88,4351.88 RN15.2@1872.88,4435.23 ; RN15.2@1872.88,4435.23 1872.88,4529.75 1910.12,4566.99 ; PC2.2@2040.12,4105.93 2041.7,4183.06 ; PC2.2@2040.12,4105.93 2041.7,4183.06
1C17: PC4.1 RL10.3 RN24.2 | length 2562.2
  BottomLayer w80: PC4.1@4571.02,4118.31 4571.02,4218.61 ; PC4.1@4571.46,4106.99 4571.02,4218.61 ; RL10.3@4738.18,4569.76 RL10.3@5022.2,4570.44 RL10.3@4739.08,4558.31 ; RL10.3@5004.56,4558.31 RL10.3@4722.2,4570.44 ; RL10.3@5011.02,4558.31 RL10.3@4711.02,4558.31 ; 4571.02,4218.61 RN24.2@4689.84,4365.47 ; 4571.02,4218.61 RN24.2@4711.02,4358.61 ; RN24.2@4689.84,4365.47 RL10.3@4722.2,4570.44 ; RN24.2@4689.84,4365.47 RL10.3@4711.02,4558.31 ; RN24.2@4711.02,4358.61 RL10.3@4722.2,4570.44 ; RN24.2@4711.02,4358.61 RL10.3@4711.02,4558.31
1C22: PB4.3 RL22.3 RN13.2 | length 738.7
  BottomLayer w80: PB4.3@9849.43,4166.34 9849.43,4596.56 9855.4,4602.53 RL22.3@10155.4,4602.53
1C27: PB4.1 RL21.3 RN12.2 | length 766.8
  BottomLayer w80: PB4.1@9446.27,4185.23 9328.25,4303.25 9328.25,4601.09 9329.69,4602.53 RL21.3@9629.69,4602.53
1C31: PB4.5 RL14.3 RN14.2 | length 790.7
  BottomLayer w80: PB4.5@10249.43,4166.34 10249.43,4289.41 10381.11,4421.1 10381.11,4602.53 RL14.3@10681.11,4602.53
1C32: PB3.5 RL20.3 RN6.2 | length 768.7
  BottomLayer w80: PB3.5@8769.43,4146.34 8769.43,4255.57 8799.71,4285.85 8799.71,4602.53 RL20.3@9099.71,4602.53
1C33: PB3.3 RL19.3 RN5.2 | length 927.7
  BottomLayer w80: 8329.43,4325.9 RN5.2@8250.1,4405.23 ; PB3.3@8369.43,4146.34 8369.43,4285.9 RN5.2@8250.1,4405.23 ; RL19.3@8574,4602.53 8274,4602.53 8250.1,4578.64 RN5.2@8250.1,4405.23
1C34: PB3.1 RL18.3 RN4.2 | length 788.9
  BottomLayer w80: RL18.3@7748.28,4602.53 8048.28,4602.53 7999.84,4554.09 7999.84,4449.17 7969.43,4418.76 PB3.1@7969.43,4146.34
1C35: PB2.5 RL17.3 RN3.2 | length 807.2
  BottomLayer w80: PB2.5@7099.43,4146.34 7099.43,4294.48 7195.87,4390.92 7195.87,4436.81 7210.18,4451.13 7210.18,4590.14 7222.57,4602.53 RL17.3@7522.57,4602.53
1C36: PB2.3 RL16.3 RN2.2 | length 780.5
  BottomLayer w80: PB2.3@6699.43,4146.34 6699.43,4374.55 RN2.2@6668.75,4405.23 6668.75,4574.42 6696.86,4602.53 RL16.3@6996.86,4602.53
1C37: PB2.1 RL15.3 RN1.2 | length 827.3
  BottomLayer w80: RL15.3@6171.15,4602.53 6471.15,4602.53 6470.61,4601.99 RN1.2@6470.61,4449.17 6299.43,4277.99 PB2.1@6299.43,4146.34
2-38: 
2-39: 
2-40: 
2-41: 
3-24: 
3-25: 
3-26: 
3-27: 
3-28: 
3-69: PA1.1 RL30.3 | length 1801
  TopLayer w40: RL30.3@2525.1,2590.09 2925.01,2990 3925.07,2990 3986.38,3051.31 3986.38,3200
3-70: PA1.2 RL31.3 | length 1643.7
  BottomLayer w50: RL31.3@3005.83,2590.09 3005.83,2805.83 3190,2990 4120,2990 4186.38,3056.38 4186.38,3200
3-71: PA1.3 RL32.3 | length 1479.3
  TopLayer w50: RL32.3@3435.5,2590.09 3435.5,2777.22 3508.28,2850 4320,2850 4386.38,2916.38 4386.38,3200
3-72: PA1.4 RL33.3 | length 1235.8
  BottomLayer w50: RL33.3@3874.22,2590.09 3874.22,2759.15 3965.07,2850 4530,2850 4586.38,2906.38 4586.38,3200
10V-面板-温度输入: 
10V-面板-湿度输入: 
24V: D15.A D16.A D17.A D18.A D19.K D20.K D21.K D22.K D37.A D38.A D39.A D40.A D41.A D42.A D43.A D44.A D45.A D46.A D47.A D48.A D49.A D50.A D51.A D52.A D53.A D54.A D55.A D61.A D65.A D67.A pad.0@11427.56,5602.53 PAX.1 PAX.2 PB7.15 PC7.15 R219.2 R292.1 RL1.1 RL2.1 RL3.1 RL4.1 RL5.2 RL6.2 RL7.1 RL8.1 RL9.1 RL10.1 RL11.1 RL12.1 RL13.1 RL14.1 RL15.1 RL16.1 RL17.1 RL18.1 RL19.1 RL20.2 RL21.1 RL22.1 RL30.1 RL31.1 RL32.1 RL33.1 RL34.2 | length 36013.6
  TopLayer w20: RL6.2@3444.58,5570.44 3516.48,5570.44 ; RL6.2@3445.47,5559.14 3516.48,5570.44 ; RL6.2@3445.47,5581.75 3516.48,5570.44 ; RL6.2@3451.41,5539.86 3516.48,5570.44 ; RL6.2@3451.41,5601.03 3516.48,5570.44 ; D61.A@3470,5810 3510.78,5810 ; D61.A@3472.28,5796.57 3510.78,5810 ; D61.A@3472.28,5823.43 3510.78,5810 ; RL5.2@3939.6,5564.93 3970.45,5481.32 ; RL5.2@3959.13,5569.72 3970.45,5481.32 ; 3967.81,5478.68 3970.45,5481.32 ; RL5.2@3970.45,5570.44 3970.45,5481.32 ; RL5.2@3981.77,5569.72 3970.45,5481.32 ; RL5.2@4001.3,5564.93 3970.45,5481.32 ; RL9.1@4165.46,5564.99 4196.32,5480.39 ; RL9.1@4185.01,5569.73 4196.32,5480.39 ; RL9.1@4196.32,5570.44 4196.32,5480.39 ; 4198.04,5478.68 4196.32,5480.39 ; RL9.1@4207.64,5569.73 4196.32,5480.39 ; RL9.1@4227.18,5564.99 4196.32,5480.39 ; 3510.78,5810 3538.67,5782.11 3538.67,5592.63 3516.48,5570.44
  TopLayer w30: RL12.1@2066.79,5566.5 2092.83,5482.44 ; RL12.1@2092.83,5570.44 2092.83,5482.44 ; RL12.1@2118.87,5566.5 2092.83,5482.44 ; RL13.1@2592.64,5566.62 2618.7,5479.67 ; RL13.1@2618.7,5570.44 2618.7,5479.67 ; RL13.1@2644.76,5566.62 2618.7,5479.67 ; RL6.2@3418.59,5566.18 3444.58,5489.13 ; RL6.2@3444.58,5570.44 3444.58,5489.13 ; RL6.2@3470.57,5566.18 3444.58,5489.13 ; PAX.1@4459.58,2567.3 4370.91,2567.3 4355.83,2552.22 ; D19.K@4656.28,2128.21 4473.6,2128.21 4459.58,2142.22 PAX.2@4459.58,2267.3 4380.75,2267.3 4355.83,2292.22 4355.83,2552.22 ; RL10.1@4696.14,5566.58 4722.2,5480.51 ; RL10.1@4722.2,5570.44 4722.2,5480.51 ; RL10.1@4748.25,5566.58 4722.2,5480.51 ; R219.2@4790,2864.14 4551.62,2864.14 4355.83,2668.35 4355.83,2552.22 ; R292.1@5166.09,5699.02 5220.02,5716.31 ; R292.1@5166.09,5733.6 5220.02,5716.31 ; RL34.2@5220.52,5573.35 5246.7,5689.63 ; RL34.2@5220.74,5565.99 5246.7,5492.48 ; RL34.2@5272.66,5565.99 5246.7,5492.48 ; RL34.2@5272.88,5573.35 5246.7,5689.63 ; RL15.1@6173.4,5609.8 6252.01,5531.19 11921.14,5531.19 RL8.1@12003.49,5613.54 ; 6696.86,5534.16 RL16.1@6696.86,5602.53 ; 7222.57,5534.16 RL17.1@7222.57,5602.53 ; 7748.28,5534.16 RL18.1@7748.28,5602.53 ; 8274,5534.16 RL19.1@8274,5602.53 ; D37.A@8988.5,5869.33 8988.5,5789.33 9099.71,5678.13 9099.71,5534.16 ; 9329.69,5534.16 RL21.1@9329.69,5602.53 ; 9855.4,5534.16 RL22.1@9855.4,5602.53 ; 10381.11,5534.16 RL14.1@10381.11,5602.53 ; 10909.59,5538.92 RL4.1@10909.59,5607.29 ; 11427.56,5534.16 pad.0@11427.56,5602.53 ; RL8.1@12004.84,5612.19 RL8.1@12003.49,5613.54 ; D43.A@12028.5,5879.33 12028.5,5739.33 12003.49,5714.32 RL8.1@12003.49,5613.54 ; 2092.83,5482.44 2107.94,5467.33 2631.05,5467.33 ; 2618.7,5479.67 2631.05,5467.33 ; 2631.05,5467.33 3422.77,5467.33 3434.12,5478.68 ; 3434.12,5478.68 3967.81,5478.68 4198.04,5478.68 4720.36,5478.68 ; 3434.12,5478.68 3444.58,5489.13 ; 4720.36,5478.68 4722.2,5480.51 ; 4720.36,5478.68 5232.9,5478.68 5246.7,5492.48 ; 5220.02,5716.31 R292.1@5163.39,5716.31 5220.02,5716.31 ; 5220.02,5716.31 5246.7,5689.63 ; 5246.7,5492.48 RL34.2@5246.7,5570.44 5246.7,5689.63
  BottomLayer w20: RL5.2@3970.45,5570.44 4039.6,5570.44 ; RL5.2@3971.38,5559.14 4039.6,5570.44 ; RL5.2@3971.38,5581.74 4039.6,5570.44 ; RL5.2@3977.55,5539.92 4039.6,5570.44 ; RL5.2@3977.55,5600.97 4039.6,5570.44 ; D65.A@4006.5,5816.86 4020,5865 ; D65.A@4011.63,5804.25 4059.04,5775.96 ; D65.A@4030.75,5823.37 4059.04,5775.96 ; D65.A@4033.5,5816.86 4020,5865 ; D67.A@4235.85,5818.25 4249.27,5855.73 ; D67.A@4249.27,5815.92 4249.27,5855.73 ; D67.A@4262.69,5818.25 4249.27,5855.73 ; 4020,5865 4030,5875 4230,5875 4249.27,5855.73 ; 4020,5865 D65.A@4020,5815 4059.04,5775.96 ; 4039.6,5570.44 4059.04,5589.88 4059.04,5775.96
  BottomLayer w30: D18.A@2625.83,1822.74 2555.32,1822.74 2525.1,1852.95 RL30.1@2525.1,1990.09 2525.1,2061.49 2555.83,2092.22 3007.96,2092.22 ; D17.A@3115.83,1822.74 3039.21,1822.74 3005.83,1856.11 RL31.1@3005.83,1990.09 3005.83,2090.09 3007.96,2092.22 ; 3435.5,2090.09 RL32.1@3435.5,1990.09 3435.5,1842.55 3455.83,1822.22 D16.A@3535.83,1822.22 ; 3874.22,2090.09 RL33.1@3874.22,1990.09 3874.22,1847.72 3895.83,1826.11 D15.A@3973.91,1826.11 ; D21.K@4648.08,1752.53 4656.28,1760.73 D19.K@4656.28,2128.21 4311.82,2128.21 4275.83,2092.22 3007.96,2092.22 ; RL10.1@4707.37,5592.21 4772.2,5620.44 ; RL10.1@4722.2,5570.44 4772.2,5620.44 ; RL10.1@4743.97,5555.61 4772.2,5620.44 ; 4772.2,5696.38 D49.A@4772.2,5810 4772.2,5620.44 ; RL15.1@6173.4,5609.8 6317.38,5609.8 6378.5,5670.92 D42.A@6378.5,5869.33 ; RL16.1@6699.03,5609.8 6843.02,5609.8 6904.14,5670.92 D41.A@6904.14,5869.33 ; RL17.1@7224.67,5609.8 7354.6,5609.8 7414.14,5669.33 D40.A@7414.14,5869.33 ; RL18.1@7750.3,5609.8 7880.24,5609.8 7939.77,5669.33 D39.A@7939.77,5869.33 ; RL19.1@8275.93,5609.8 8405.87,5609.8 8465.4,5669.33 D38.A@8465.4,5869.33 ; RL21.1@9327.2,5609.8 9457.13,5609.8 9516.67,5669.33 D46.A@9516.67,5869.33 ; RL22.1@9852.83,5609.8 9982.76,5609.8 10042.3,5669.33 D47.A@10042.3,5869.33 ; RL14.1@10378.46,5609.8 10508.4,5609.8 10567.93,5669.33 D45.A@10567.93,5869.33 ; RL4.1@10904.09,5609.8 11034.03,5609.8 11093.56,5669.33 D48.A@11093.56,5869.33 ; RL7.1@11424.12,5610.92 11424.12,5684.94 11458.5,5719.33 D44.A@11458.5,5879.33
  BottomLayer w40: RL1.1@-10.67,5570.44 189.56,5570.44 190,5570 ; RL1.1@-9.26,5549.15 150.67,5570.44 RL1.1@-9.26,5591.73 ; RL2.1@493.96,5568.41 515.21,5458.5 ; RL2.1@516.72,5549.16 665.44,5570.44 ; RL2.1@516.72,5591.73 665.44,5570.44 ; RL2.1@536.45,5568.41 515.21,5458.5 ; D51.A@750,5810 750,5655 665.44,5570.44 ; RL3.1@1019.83,5568.47 1041.08,5454.91 ; RL3.1@1042.91,5549.18 1165.44,5570.44 ; RL3.1@1042.91,5591.7 1165.44,5570.44 ; RL3.1@1062.33,5568.47 1041.08,5454.91 ; D50.A@1250,5810 1250,5655 1165.44,5570.44 ; RL11.1@1545.72,5568.38 1566.95,5460.14 ; RL11.1@1568.76,5549.18 1692.79,5570.44 ; RL11.1@1568.76,5591.7 1692.79,5570.44 ; RL11.1@1588.19,5568.38 1566.95,5460.14 ; D55.A@1760,5810 1760,5637.65 1692.79,5570.44 ; RL12.1@2071.62,5568.09 2092.83,5473.46 ; RL12.1@2094.73,5549.19 2212.79,5570.44 ; RL12.1@2094.73,5591.7 2212.79,5570.44 ; RL12.1@2114.04,5568.09 2092.83,5473.46 ; D54.A@2265.64,5810 2265.64,5623.3 2212.79,5570.44 ; RL13.1@2618.7,5570.44 2780.44,5570.44 2820,5610 D53.A@2820,5810 ; RL13.1@2620.11,5549.15 2780.04,5570.44 RL13.1@2620.11,5591.73 ; D38.A@8465.4,5869.33 8465.4,6379.33 8585,6498.93 9388.91,6498.93 9438.5,6449.33 PB7.15@9438.5,6369.33 ; 190,5570 190,5501.93 237.56,5454.37 511.08,5454.37 ; 190,5570 D52.A@190,5810 190,6130 239.35,6179.35 1417.88,6179.35 ; 511.08,5454.37 1040.55,5454.37 ; 511.08,5454.37 515.21,5458.5 ; 515.21,5458.5 RL2.1@515.21,5570.44 665.44,5570.44 ; 1040.55,5454.37 1572.72,5454.37 ; 1040.55,5454.37 1041.08,5454.91 ; 1041.08,5454.91 RL3.1@1041.08,5570.44 1165.44,5570.44 ; 1417.88,6179.35 PC7.15@1452.35,6101.59 ; 1417.88,6179.35 1452.35,6144.89 ; PC7.15@1452.35,6101.59 1452.35,6144.89 ; PC7.15@1452.35,6101.59 1452.35,6144.89 ; PC7.15@1452.35,6101.59 1452.35,6144.89 ; 1566.95,5460.14 1572.72,5454.37 ; 1566.95,5460.14 RL11.1@1566.95,5570.44 1692.79,5570.44 ; 1572.72,5454.37 2073.74,5454.37 2092.83,5473.46 ; 2092.83,5473.46 RL12.1@2092.83,5570.44 2212.79,5570.44
24V+: 
24V-情报-负压: 
24V-情报-远值: 
24V-情报-远启: 
24V-面板-值机: D21.A PAX.8 R217.2 RL31.2 | length 2805.3
  BottomLayer w25: R217.2@3375.83,1732.22 3375.83,1702.22 3405.83,1672.22 5017.77,1672.22 5048.08,1702.53 D21.A@5048.08,1752.53 4865.53,1752.53 4759.58,1858.47 PAX.8@4759.58,2267.3
  BottomLayer w30: RL31.2@3305.83,1990.09 3305.83,1906.11 3375.83,1836.11 R217.2@3375.83,1732.22
24V-面板-故障: D19.A PAX.14 R215.2 RL33.2 | length 2028.4
  TopLayer w30: R215.2@4305.83,2222.22 4224.22,2222.22 4174.22,2172.22 RL33.2@4174.22,1990.09 4457.96,1990.09 4475.83,1972.22 4475.83,1732.22 4515.83,1692.22 4621.42,1692.22 4622.61,1691.03 4744.34,1691.03 4775.83,1722.53 4775.83,2108.21 4795.83,2128.21 D19.A@5056.28,2128.21
  BottomLayer w30: D19.A@5056.28,2128.21 5059.58,2131.51 PAX.14@5059.58,2267.3
24V-面板-滤网: D22.A PAX.12 R216.2 RL32.2 | length 2608.2
  TopLayer w20: RL32.2@3735.5,1990.09 3735.5,1902.55 3745.83,1892.22 4391.37,1892.22 4415.83,1867.75 4415.83,1695.65 4460.45,1651.03 4760.9,1651.03 4815.83,1705.96 4815.83,1982.22 4835.01,2001.4 D22.A@5056.28,2001.4
  BottomLayer w30: RL32.2@3735.5,1990.09 3735.5,1792.55 3795.83,1732.22 R216.2@3865.83,1732.22 ; PAX.12@4959.58,2267.3 4959.58,2048.47 5006.66,2001.4 D22.A@5056.28,2001.4
24V-面板-运行: D20.A PAX.10 R218.2 RL30.2 | length 3484.5
  BottomLayer w25: RL30.2@2825.1,1990.09 2825.1,1872.95 2885.83,1812.22 2885.83,1732.22 2885.83,1652.22 2905.83,1632.22 5115.83,1632.22 5145.83,1662.22 5145.83,1862.22 5130.3,1877.75
  BottomLayer w30: PAX.10@4859.58,2267.3 4859.58,1948.47 4930.3,1877.75 D20.A@5052.32,1877.75 5130.3,1877.75
24VIN: 
24VIN2: 
164CLK: 
164SDA: 
165S_DO1: 
165S_DO2: 
165S_DO3: 
165S_DO4: 
220V_N: pad.0@5876.88,4493.05 pad.2 PB1'.1 PB1.1 PB2.2 PB2.4 PB2.6 PB3.2 PB3.4 PB3.6 PB4.2 PB4.4 PB4.6 PB4.8 PB5.3 PC1.1 PC2.1 PC3.1 PC3.2 PC5.1 PC5.2 UB1.1 | length 37723.1
  TopLayer w20: PC3.2@2872.64,4106.99 PC3.1@3072.64,4106.99 ; PC3.2@2876.19,4078.16 2991.7,4106.99 ; PC3.2@2876.19,4135.83 2991.7,4106.99 ; PC3.2@2882.75,4058.99 2991.7,4106.99 ; PC3.2@2882.75,4155 2991.7,4106.99 ; PC3.1@3062.54,4058.99 2953.59,4106.99 ; PC3.1@3062.54,4155 2953.59,4106.99 ; PC3.1@3069.1,4078.16 2953.59,4106.99 ; PC3.1@3069.1,4135.83 2953.59,4106.99 ; PC5.1@5084.85,4106.99 5355.37,4106.99 5400.88,4152.5 5400.88,5042.1 pad.2@5479.2,5120.42 5411.77,5052.99 ; PC5.1@5088.39,4078.16 5203.9,4106.99 ; PC5.1@5088.39,4135.83 5203.9,4106.99 ; PC5.1@5094.95,4058.99 5203.9,4106.99 ; PC5.1@5094.95,4155 5203.9,4106.99 ; pad.2@5467.79,5130.16 5411.77,5052.99 ; pad.2@5488.94,5109.01 5411.77,5052.99 ; PB1'.1@5766.94,4512.28 5770.31,4512.28 5870.31,4412.28
  TopLayer w80: PC1.1@305.12,4105.93 305.12,3854.64 385.17,3774.59 514.47,3774.59 ; 4884.85,3785.47 PC5.2@4884.85,4106.99 ; 5084.85,3774.25 PC5.1@5084.85,4106.99 ; 6499.43,3920.66 PB2.2@6499.43,4146.34 ; 6899.43,3967.41 PB2.4@6899.43,4146.34 ; 7299.43,3908.16 PB2.6@7299.43,4146.34 ; 8169.43,3920.66 PB3.2@8169.43,4146.34 ; 8569.43,3967.41 PB3.4@8569.43,4146.34 ; 8969.43,3908.16 PB3.6@8969.43,4146.34 ; 9649.43,3940.66 PB4.2@9649.43,4166.34 ; 10049.43,3940.66 PB4.4@10049.43,4166.34 ; 10449.43,3928.16 PB4.6@10449.43,4166.34 ; 10849.43,3928.16 PB4.8@10849.43,4166.34 ; 11599.38,3917.55 PB5.3@11599.38,4155.73
  TopLayer w120: 5870.31,4412.28 5870.31,4568.03 5916.54,4614.26 5962.78,4568.03 ; pad.0@5883.2,4506.05 5929.44,4552.28 ; pad.0@5925.29,4459.81 5971.53,4506.05
  TopLayer w300: 514.47,3774.59 514.81,3774.25 4959.37,3774.25 ; 5870.31,4412.28 5870.31,4140.87 6196.38,3814.8 11676.16,3814.8
  BottomLayer w20: UB1.1@2860,6470 3102.18,6470 3162.18,6529.99 4877.77,6529.99 5444.73,5963.03 5444.73,5222.21 5479.19,5187.76 ; UB1.1@2863.88,6442.77 2957.5,6470 UB1.1@2863.88,6497.23 ; pad.2@5464.29,5122.09 5479.19,5187.76 ; pad.2@5494.1,5122.09 5479.19,5187.76 ; 5479.19,5187.76 pad.2@5479.2,5120.42 5479.19,5187.76
  BottomLayer w80: PC1.1@300.51,4099.25 300.51,3959.25 ; PC1.1@305.12,4105.93 300.51,3959.25 ; 425.45,3734.31 300.51,3859.25 300.51,3959.25 ; 475.51,3844.25 415.51,3844.25 300.51,3959.25 ; PC2.1@1840.12,4105.93 1841.7,3876.05 PC2.1@1841.7,4098.31 ; 2872.64,3884.2 PC3.2@2872.64,4106.99 ; 3072.64,3896.8 PC3.1@3072.64,4106.99 ; 4884.85,3780.55 PC5.2@4884.85,4106.99 ; 4959.37,3774.25 5084.85,3899.73 PC5.1@5084.85,4106.99 ; 6499.43,3920.66 PB2.2@6499.43,4146.34 ; 6899.43,3967.41 PB2.4@6899.43,4146.34 ; 7299.43,3908.16 PB2.6@7299.43,4146.34 ; 8169.43,3920.66 PB3.2@8169.43,4146.34 ; 8569.43,3967.41 PB3.4@8569.43,4146.34 ; 8969.43,3908.16 PB3.6@8969.43,4146.34 ; 9649.43,3940.66 PB4.2@9649.43,4166.34 ; 10049.43,3940.66 PB4.4@10049.43,4166.34 ; 10449.43,3928.16 PB4.6@10449.43,4166.34 ; 10849.43,3928.16 PB4.8@10849.43,4166.34 ; 11599.38,3917.55 PB5.3@11599.38,4155.73
  BottomLayer w120: pad.0@5870.31,4552.68 5870.31,4574.42 ; 5939.66,4569.41 PB1.1@5939.66,4591.15 ; 5971.53,4490.55 5971.53,4512.28
  BottomLayer w300: 514.81,3774.25 4959.37,3774.25 ; 5870.31,4412.28 5870.31,4140.87 6196.38,3814.8 11676.16,3814.8
485-A: 
485-B: 
485_GND_1: 
485_GND_2: 
485_GND_3: 
485_VCC_1: 
485_VCC_2: 
485_VCC_3: 
+10V: 
+15V: 
<-变频故障: 
<-变频运行: 
<-工频故障: 
<-工频运行: 
<-急停按钮: 
<-本地值机: 
<-本地运行: 
<-远值使能: 
<-远起使能: 
AC24GATE1: 
AC24GATE2: 
AC24V1: PB6.1 RL8.4 | length 1777
  BottomLayer w80: PB6.1@11921.07,6272.28 12168.5,6024.85 12168.5,4809.8 12259.02,4809.8 ; RL8.4@12003.49,4813.54 12007.23,4809.8 12123.48,4809.8
AC24V2: PB5.6 PB6.2 | length 2591.2
  BottomLayer w80: PB6.2@11721.07,6272.28 11721.07,6082.28 11588.5,5949.71 11588.5,5443.64 11863.8,5168.34 11863.8,4416.71 11900.34,4380.17 12184.83,4380.17 12199.38,4365.62 PB5.6@12199.38,4155.73
AD1: 
AD2: 
AD3: 
AD4: 
AD5: 
AD6: 
CLK_165: 
C变频: 
C情报输出: PA1.5 RL30.4 RL31.4 RL32.4 RL33.4 | length 3330.4
  BottomLayer w60: RL31.4@3305.83,2490.09 3305.83,2372.38 3305.67,2372.22 ; RL32.4@3735.5,2490.09 3735.5,2372.22 ; 3786.38,3200 3020,3200 2825.1,3005.1 RL30.4@2825.1,2490.09 2825.1,2422.95 2875.83,2372.22 3305.67,2372.22 ; RL33.4@4174.22,2490.09 4174.22,2402.22 4144.22,2372.22 3735.5,2372.22 ; 3305.67,2372.22 3735.5,2372.22
DA_ADD1: 
DA_ADD2: 
DA_WR1: 
DA_WR2: 
DB0: 
DB1: 
DB2: 
DB3: 
DB4: 
DB5: 
DB6: 
DB7: 
DE/RE: 
DE/RE2: 
DI1: 
DI2: 
DI3: 
DI4: 
DI5: 
DI6: 
DI7: 
DI8: 
DI9: 
DI10: 
DI11: 
DI12: 
DI13: 
DI14: 
DI15: 
DI15A: 
DI16: 
DI17: 
DI18: 
DI19: 
DI20: 
DI21: 
DI22: 
DI23: 
DI24: 
DI25: 
DI26: 
DI27: 
DI28: 
DI29: 
DI30: 
DI31: 
DI32: 
DI33: 
DI34: 
DI35: 
DI36: 
DI37: 
DI38: 
DI39: 
DI40: 
EX_A1: 
EX_B1: 
GND: D110.K PAX.3 PAX.4 PAX.6 PAX.7 PAX.9 PB7.17 PC7.17 R220.2 RL34.1 | length 7735.7
  TopLayer w20: PC7.17@1332.98,6104.1 1352.35,6177.35 ; PC7.17@1371.71,6104.1 1352.35,6177.35 ; RL34.1@5516.23,5577.76 5546.7,5637.54 ; RL34.1@5535.4,5571.4 5546.7,5637.54 ; RL34.1@5546.7,5570.44 5546.7,5637.54 ; D110.K@5552.96,5904.68 5506.83,5970 ; D110.K@5552.97,5922.25 5505.89,5855.96 ; RL34.1@5558,5571.4 5546.7,5637.54 ; D110.K@5572.15,5923.87 5506.83,5970 ; D110.K@5572.17,5903.05 5505.89,5855.96 ; RL34.1@5577.17,5577.76 5546.7,5637.54 ; 1352.35,6177.35 PC7.17@1352.35,6101.59 1352.35,6177.35 ; 1352.35,6177.35 1445,6270 2370,6270 2670,5970 5506.83,5970 ; 5505.89,5855.96 5505.89,5678.35 5546.7,5637.54 ; 5505.89,5855.96 D110.K@5563.38,5913.45 ; 5505.89,5855.96 D110.K@5563.38,5913.45 ; 5506.83,5970 D110.K@5563.38,5913.45
  BottomLayer w20: PAX.6@4659.58,2267.3 4709.58,2317.3 4709.58,2710 ; PAX.7@4759.58,2567.3 R220.2@4759.58,2710
  BottomLayer w40: PAX.4@4559.58,2267.3 4559.58,2225.21 4534.8,2200.42 4417.29,2200.42 4386.38,2231.34 4386.38,2633.96 4397.48,2645.06 4559.58,2645.06 ; PAX.3@4559.58,2567.3 4559.58,2645.06 ; PAX.9@4859.58,2567.3 4859.58,2690 4839.58,2710 4759.58,2710 4709.58,2710 4592.05,2710 4559.58,2677.53 4559.58,2645.06
IN2-A+: 
IN2-B-: 
IN-A+: 
IN-B-: 
L: pad.0@5876.88,4922.18 PB1'.3 PB1.2 RL4.4 RL7.4 RL14.4 RL15.4 RL16.4 RL17.4 RL18.4 RL19.4 RL20.4 RL21.4 RL22.4 RN1.1 RN2.1 RN3.1 RN4.1 RN5.1 RN6.1 RN11.1 RN12.1 RN13.1 RN14.1 RN21.1 | length 6808.8
  TopLayer w30: RN1.1@6168.25,4403.5 6252.7,4403.5 6276.74,4427.54 6276.74,4795.14 6268.4,4803.48 RL15.4@6177.43,4803.48 ; RN2.1@6977.89,4455.36 6914.78,4455.36 6891.27,4478.87 6891.27,4795.14 6899.61,4803.48 RL16.4@6990.58,4803.48 ; RN3.1@7498.23,4450.9 7670.85,4450.9 RN4.1@7718.25,4403.5 ; RN3.1@7503.6,4455.36 7455.63,4455.36 7416.98,4494.01 7416.98,4795.14 7425.32,4803.48 RL17.4@7516.3,4803.48 ; RN5.1@8555.03,4455.36 8507.06,4455.36 8468.4,4494.01 8468.4,4795.14 8476.75,4803.48 RL19.4@8567.72,4803.48 ; RN6.1@9080.61,4455.36 RN6.1@9080.74,4455.36 ; RN6.1@9080.61,4469.17 9050.59,4469.17 8994.12,4525.65 8994.12,4795.14 9002.46,4803.48 RL20.4@9093.43,4803.48 ; RL21.4@9623.41,4803.48 9532.44,4803.48 9524.1,4795.14 9524.1,4494.01 9548.94,4469.17 RN12.1@9629.17,4469.17 ; RL22.4@10149.12,4803.48 10058.15,4803.48 10049.81,4795.14 10049.81,4494.01 10074.65,4469.17 RN13.1@10150.61,4469.17 RN13.1@10154.88,4469.17 ; RL14.4@10674.84,4803.48 10583.86,4803.48 10575.52,4795.14 10575.52,4494.01 10600.37,4469.17 RN14.1@10680.61,4469.17 ; RL4.4@11203.32,4808.24 11112.34,4808.24 11104,4799.9 11104,4445.76 11126.27,4423.5 RN21.1@11209.07,4423.5
  TopLayer w60: RN21.1@11209.07,4423.5 11213.63,4428.06 RN11.1@11407.27,4428.06 ; 11270.19,4423.5 RN11.1@11392.11,4423.5
  BottomLayer w60: RL4.4@11204.09,4809.8 11205.21,4810.92 RL7.4@11424.12,4810.92 RL7.4@11724.12,4810.92 ; 11237.44,4866.91 11255.71,4848.63 11686.4,4848.63 RL7.4@11724.12,4810.92 ; 11255.71,4773.21 11260.85,4768.07 11681.27,4768.07 RL7.4@11724.12,4810.92
LAMP1: 
LAMP2: 
LAMP3: 
LAMP4: 
LAMP5: 
LAMP6: 
LAMP7: 
LAMP8: 
LAMP9: 
LAMP10: 
LAMP11: 
LAMP12: 
LAMP13: 
LAMP14: 
LOUT1: 
LOUT2: 
LOUT3: 
LOUT4: 
LOUT5: 
LOUT6: 
LOUT7: 
LOUT8: 
LOUT9: 
LOUT10: 
LOUT11: 
LOUT12: 
LOUT13: 
LOUT14: 
L加热: PC6.2 RL11.4 RL12.4 RL13.4 RN10.1 RN17.1 | length 12247.4
  TopLayer w20: RN10.1@2387.67,4431.84 2412.88,4339.79 RN10.1@2438.09,4431.84 ; RN10.1@2412.88,4435.23 2412.88,4323.77 2465.94,4270.71 2872.44,4270.71 2932.88,4331.15 RN17.1@2932.88,4435.23 3020.89,4435.23 ; RN17.1@2907.67,4431.84 2932.88,4339.79 RN17.1@2958.09,4431.84 ; RL13.4@2917.15,4759.21 2961.7,4758.77 ; RL13.4@2917.98,4759.13 3012.85,4758.77 ; RL13.4@2920.03,4739.13 3012.85,4758.77 ; RL13.4@2920.77,4781.59 3012.85,4758.77 ; RL13.4@2921.65,4739.24 2961.7,4758.77 ; RL13.4@2923.04,4780.92 2961.7,4758.77 ; RL13.4@2927.64,4800.48 3012.85,4758.77 ; RN17.1@2936.55,4410.06 3020.89,4435.23 ; RN17.1@2936.55,4460.39 3020.89,4435.23 ; RL13.4@2937.03,4795.87 2961.7,4758.77 ; 2961.7,4758.77 RL13.4@2918.7,4770.44 3012.85,4758.77 ; 2961.7,4758.77 3012.85,4758.77 ; 3012.85,4758.77 3052.38,4719.24 3052.38,4466.72 3020.89,4435.23
  BottomLayer w45: 2746.16,4793.35 2746.16,5068.72 2797.85,5120.41 3653,5120.41 3832.82,5300.24 4315.2,5300.24 4362.49,5347.53 4362.49,6117.04 PC6.2@4335.83,6143.7 4362.49,5941.31 ; PC6.2@4300.16,6135.7 4362.49,5941.31 ; PC6.2@4372.35,6145.21 4362.49,5941.31
  BottomLayer w118.11: 1692.12,4793.35 RL12.4@2092.83,4770.44 ; 1991.8,4793.35 RL12.4@2392.83,4770.44 ; 2217.55,4793.35 RL13.4@2618.7,4770.44 ; RL11.4@1566.95,4770.44 RL11.4@1866.95,4770.44 ; RL11.4@1566.95,4770.44 1972.97,4793.35 RL11.4@1866.95,4770.44 ; RL11.4@1566.95,4770.44 RL11.4@1589.86,4793.35 ; RL11.4@1589.86,4793.35 RL11.4@1866.95,4770.44 ; RL11.4@1589.86,4793.35 2746.16,4793.35 ; RL11.4@1866.95,4770.44 RL12.4@2092.83,4770.44 ; RL11.4@1866.95,4770.44 2268.03,4793.35 RL12.4@2092.83,4770.44 ; RL12.4@2092.83,4770.44 RL12.4@2392.83,4770.44 ; RL12.4@2092.83,4770.44 2493.73,4793.35 RL12.4@2392.83,4770.44 ; RL12.4@2392.83,4770.44 RL13.4@2618.7,4770.44 ; RL12.4@2392.83,4770.44 2746.16,4793.35 ; RL13.4@2618.7,4770.44 2746.16,4793.35 ; RL13.4@2618.7,4770.44 2746.16,4793.35 ; 2746.16,4793.35 RL13.4@2918.7,4770.44 2895.8,4793.35 2746.16,4793.35
L变频: PC6.3 RL5.4 RL6.4 RL10.4 RL34.4 RN8.1 RN9.1 RN23.1 RN24.1 | length 9484.1
  TopLayer w20: RL5.4@3965.44,4760.21 4056.41,4760.21 ; RN8.1@3965.81,4415.9 4026.1,4412.09 ; RN8.1@3969.59,4390.75 4026.1,4412.09 ; RL5.4@3969.85,4759.12 4056.41,4760.21 ; RL5.4@3970.45,4770.44 4056.41,4760.21 ; RL5.4@3972.44,4739.17 4056.41,4760.21 ; RL5.4@3972.52,4781.59 4056.41,4760.21 ; RN8.1@3972.72,4440.38 4026.1,4412.09 ; RN8.1@3978.13,4412.09 4026.1,4412.09 ; RL5.4@3979.73,4800.38 4056.41,4760.21 ; RN23.1@4497.57,4411.14 4545.54,4411.14 ; RN23.1@4504.31,4386.62 4545.54,4411.14 ; RN23.1@4504.31,4435.66 4545.54,4411.14 ; RL10.4@4697.19,4789.33 4639.05,4686.34 ; RL10.4@4711.02,4758.31 4584.19,4631.47 4584.19,4449.79 4545.54,4411.14 ; RL10.4@4713.76,4778.02 4639.05,4686.34 ; RL10.4@4722.2,4770.44 4639.05,4686.34 ; RL10.4@4729.87,4762.09 4639.05,4686.34 ; RL10.4@4741.37,4745.65 4639.05,4686.34 ; 4026.1,4412.09 4064.75,4450.74 4064.75,4751.87 4056.41,4760.21
  TopLayer w39.37: RL6.4@3144.58,4770.44 3241.8,4770.44 ; RL6.4@3146.99,4748.92 3241.8,4770.44 ; RL6.4@3146.99,4791.96 3241.8,4770.44 ; RN9.1@3167.07,4358.75 3251.82,4358.75 3289.76,4396.69 3289.76,4722.48 3241.8,4770.44
  BottomLayer w45: 3802.08,4770.44 3802.08,5000.55 3943.31,5141.77 4876.38,5141.77 ; PC6.3@4535.83,6143.7 4763.19,6143.7 4876.38,6030.51 4876.38,5141.77 ; PC6.3@4539.27,6107.31 4729.88,6143.7 PC6.3@4539.27,6180.09 ; 4874.92,4774.25 4876.38,4775.71 4876.38,5141.77
  BottomLayer w60: RN24.1@4992.2,4411.14 5380.83,4411.14 5391.91,4422.22 5391.91,4758.31 ; RL10.4@5022.2,4770.44 5090.93,4758.31 5100.51,4748.73 RL10.4@5022.2,4770.44
  BottomLayer w80: RL6.4@3144.58,4770.44 RL6.4@3444.58,4770.44 RL5.4@3670.45,4770.44 3802.08,4770.44 ; RL10.4@4722.2,4770.44 RL10.4@5022.2,4770.44 RL34.4@5246.7,4770.44 5519.32,4770.44 RL34.4@5530.51,4759.25 ; RL34.4@5265.36,4770.44 RL34.4@5546.7,4770.44 ; 3802.08,4770.44 RL5.4@3970.45,4770.44 3802.08,4770.44